# Altium PCB Mach_actor_v1.final.PcbDoc
Units mil, origin at the board's own origin, x right, y up, seen from the top; angles counter-clockwise.
Board outline 5050 x 2900 mil, 2 copper layers (Top Layer, Bottom Layer); 138 components, 95 nets, 421 pads, 81 vias.
Unrouted connection lines stored in the file: 16.
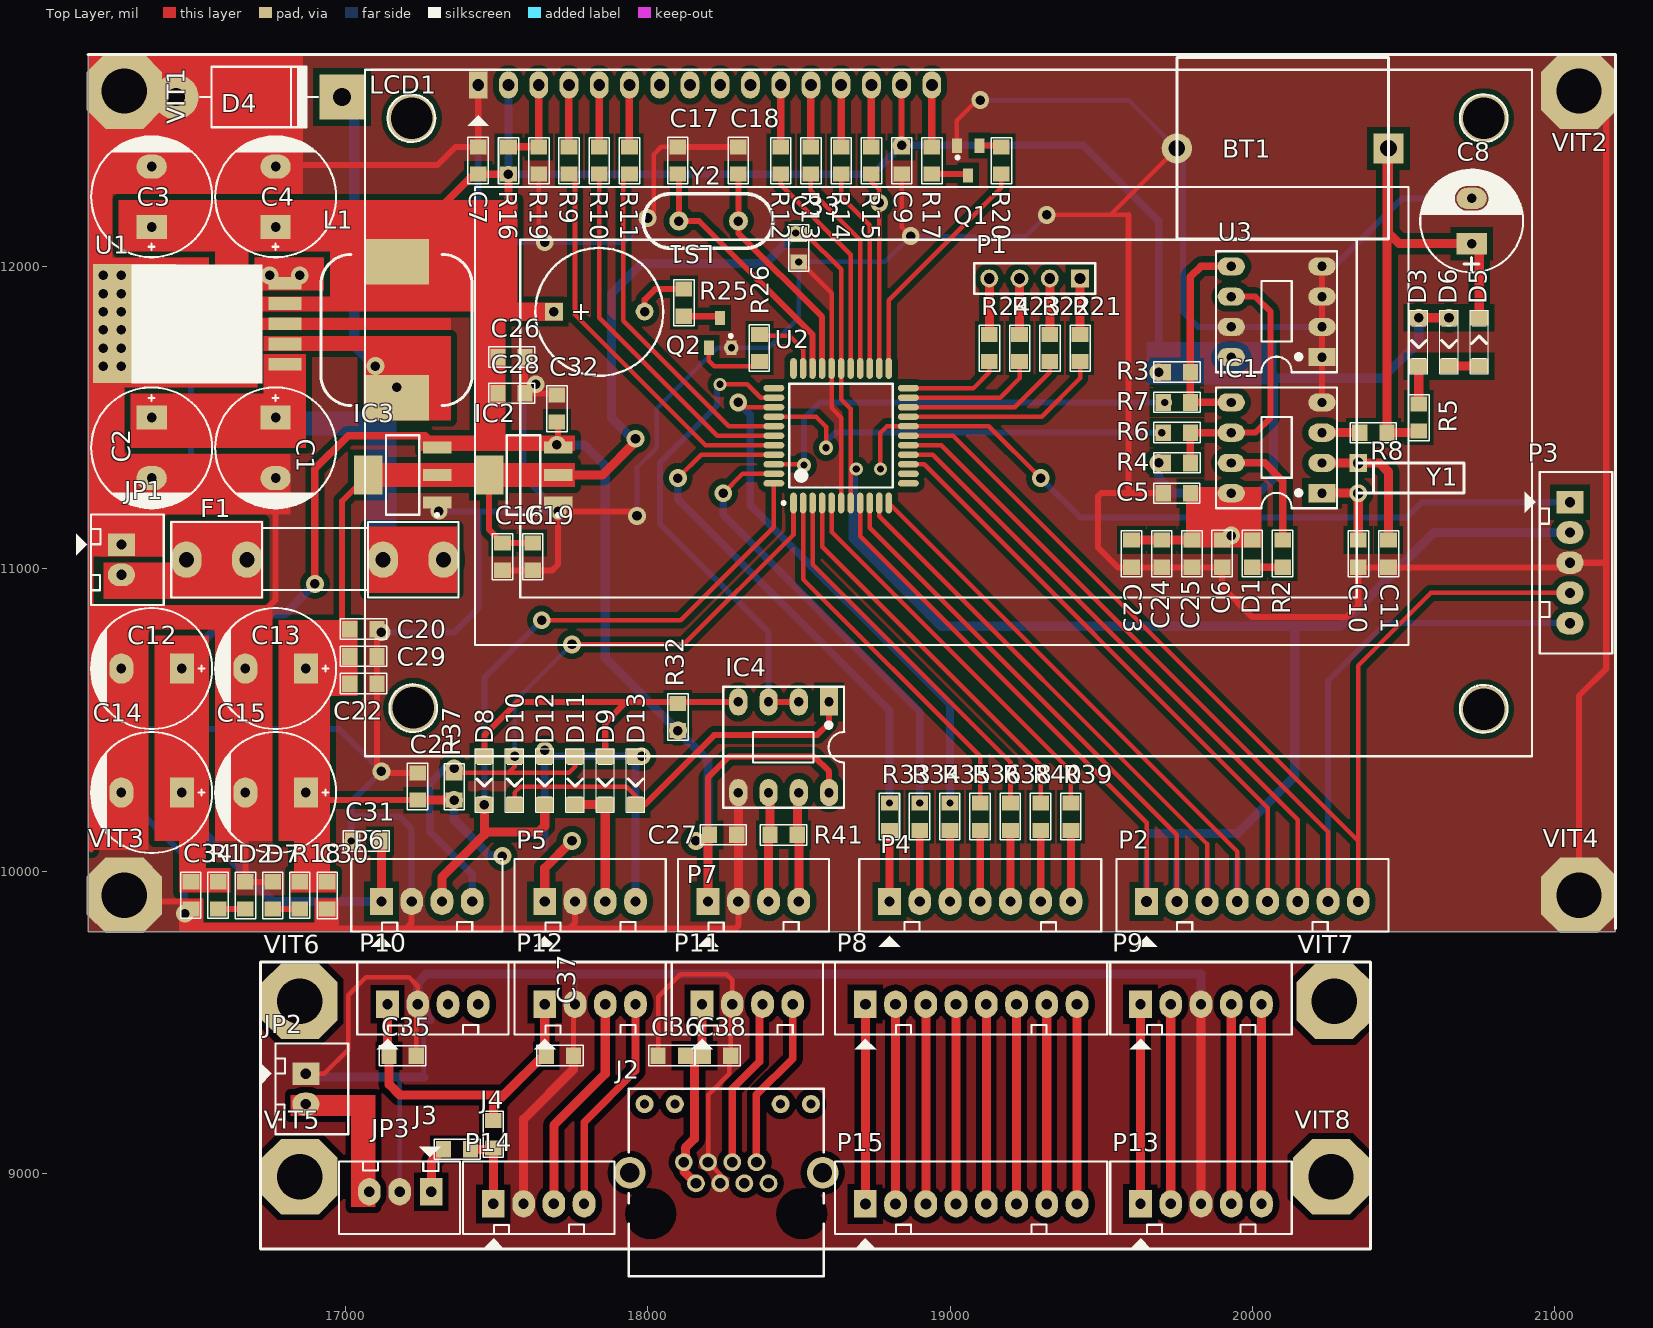
[diagram p0: Top Layer view]
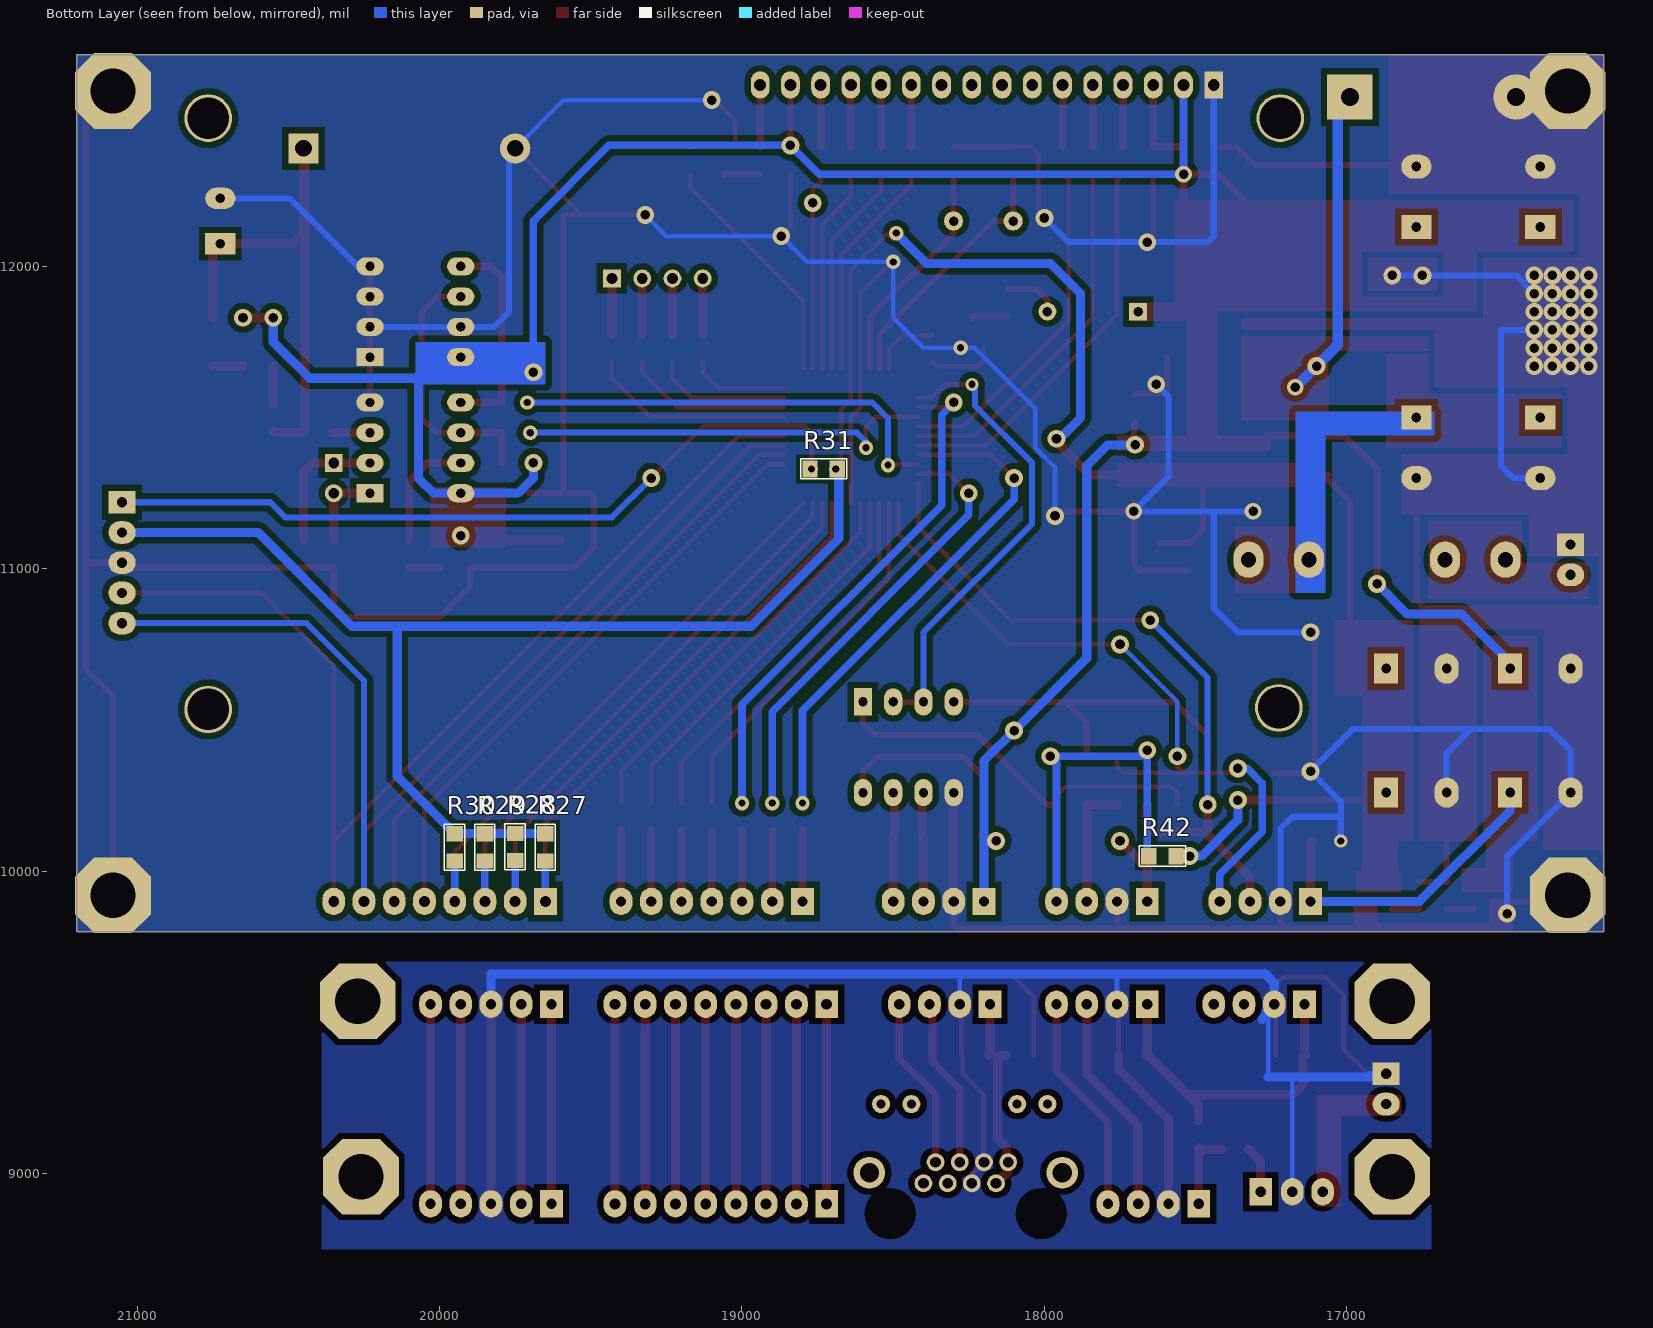
[diagram p1: Bottom Layer view, seen from below]

## Layer stack, top to bottom
Top Layer: signal copper 1.4
Dielectric: dielectric 12.6, FR-4, Dk 4.8
Bottom Layer: signal copper 1.4

## Board outline
16150,12700 21200,12700 21200,9800 16150,9800

## Design rules (kind name [scope] priority, off if disabled: settings)
Clearance [All] p1: gap=20
PlaneConnect [All] p1: planeconnectstyle=Direct reliefexpansion=20 reliefentries=4 reliefconductorwidth=10 reliefairgap=10
PolygonConnect [All] p1: connectstyle=Direct reliefconductorwidth=10 reliefentries=4 polygonreliefangle="90 Angle"
RoutingVias [All] p1: holewidth=28 width=50 viastyle="Through Hole" minholewidth=28 minwidth=50 maxholewidth=28 maxwidth=50
SilkscreenOverComponentPads [All] p1: minsilkscreentomaskgap=10
SolderMaskExpansion [All] p1: expansion=4
Width [All] p1: maxlimit=100 minlimit=15 preferedwidth=20
26 further rules are at their usual default settings.

## Classes and differential pairs
component class Mach_actor_v1: BT1 C1 C2 C3 C4 C5 C6 C7 C8 C9 C10 C11 C12 C13 C14 C15 C16 C17 C18 C19 C20 C21 C22 C23 C24 C25 C26 C27 C28 C29 C30 C31 C32 C33 C34 D1 D2 D3 D4 D5 D6 D7 D8 D9 D10 D11 D12 D13 F1 IC1 IC2 IC3 IC4 JP1 L1 LCD1 LS1 P1 P2 P3 P4 P5 P6 P7 Q1 Q2 R1 R2 R3 R4 R5 R6 R7 R8 R9 R10 R11 R12 R13 R14 R15 R16 R17 R18 R19 R20 R21 R22 R23 R24 R25 R26 R27 R28 R29 R30 R31 R32 R33 R34 R35 R36 R37 R38 R39 R40 R41 R42 U1 U2 U3 VIT1 VIT2 VIT3 VIT4 Y1 Y2
component class Sheet1: C35 C36 C37 C38 J2 J3 J4 JP2 JP3 P8 P9 P10 P11 P12 P13 P14 VIT5 VIT6 VIT7 VIT8

## Components (designator, comment, footprint, x,y, rotation, side; value= is the part's Value field where it differs from the comment)
BT1 "PIN 3V" PIN_NIMH 20350,12390 r180 top
C1 "1000uF/16V" CP2/4 16770,11500 r270 top
C2 "1000uF/16V" CP2/4 16360,11500 r270 top
C3 "1000uF/16V" CP2/4 16360,12130 r90 top
C4 "1000uF/16V" CP2/4 16770,12130 r90 top
C5 "104" SM-0805 19750,11250 r0 top
C6 "104" SM-0805 19900,11050 r270 top
C7 "104" SM-0805 17440,12350 r270 top
C8 "1000uF/16V" CP1.5/3.4 20725,12075 r90 top
C9 "104" SM-0805 18840,12350 r90 top
C10 "104" SM-0805 20350,11050 r90 top
C11 "104" SM-0805 20450,11050 r90 top
C12 "1000uF/16V" CP2/4 16460,10670 r180 top
C13 "1000uF/16V" CP2/4 16870,10670 r180 top
C14 "1000uF/16V" CP2/4 16460,10260 r180 top
C15 "1000uF/16V" CP2/4 16870,10260 r180 top
C16 "104" SM-0805 17520,11040 r90 top
C17 "104" SM-0805 18100,12350 r270 top
C18 "104" SM-0805 18300,12350 r270 top
C19 "104" SM-0805 17620,11040 r90 top
C20 "104" SM-0805 17060,10800 r180 top
C21 "104" SM-0805 17240,10280 r270 top
C22 "104" SM-0805 17060,10620 r180 top
C23 "104" SM-0805 19600,11050 r90 top
C24 "104" SM-0805 19700,11050 r90 top
C25 "104" SM-0805 19800,11050 r90 top
C26 "104" SM-0805 17550,11700 r180 top
C27 "104" SM-0805 18250,10120 r180 top
C28 "104" SM-0805 17550,11580 r180 top
C29 "104" SM-0805 17060,10710 r180 top
C30 "104" SM-0805 16940,9920 r90 top
C31 "104" SM-0805 17070,10100 r0 top
C32 "104" SM-0805 17700,11530 r90 top
C33 "104" SM-0805 18500,12060 r270 top
C34 "104" SM-0805 16490,9920 r270 top
C35 "104" SM-0805 17190,9390 r0 top
C36 "104" SM-0805 18080,9390 r180 top
C37 "104" SM-0805 17710,9390 r180 top
C38 "104" SM-0805 18230,9390 r180 top
D1 "LED5" SM-0805 20000,11050 r270 top
D2 "LED5" SM-0805 16670,9920 r90 top
D3 "1N4148" "1n4148 smd" 20550,11750 r270 top
D4 "1N5822" D5A 16990,12560 r180 top
D5 "1N4148" "1n4148 smd" 20750,11750 r90 top
D6 "1N4148" "1n4148 smd" 20650,11750 r270 top
D7 "LED5" SM-0805 16760,9920 r90 top
D8 "1N4148" "1n4148 smd" 17460,10300 r270 top
D9 "1N4148" "1n4148 smd" 17860,10300 r270 top
D10 "1N4148" "1n4148 smd" 17560,10300 r270 top
D11 "1N4148" "1n4148 smd" 17760,10300 r270 top
D12 "1N4148" "1n4148 smd" 17660,10300 r270 top
D13 "1N4148" "1n4148 smd" 17960,10300 r270 top
F1 "F1A" Fuse 16900,11030 r180 top
IC1 "DS1307" DIP8/W0.3 20230,11250 r90 top
IC2 "LM1117" SOT223-4N 17590,11310 r180 top
IC3 "LM1117" SOT223-4N 17190,11310 r180 top
IC4 "MAX485" DIP8/W0.3 18600,10560 r180 top
J2 "RJ45" RJ45 17940,9280 r0 top
J3 "Jumper 2" SM-0805 17370,9080 r180 top
J4 "Jumper 2" SM-0805 17490,9130 r270 top
JP1 "Connector 2" CON2 16260,11080 r270 top
JP2 "Connector 2" CON2 16870,9330 r270 top
JP3 "Connector 3" CON3 17280,8940 r180 top
L1 "300mH" Inductorsmd 17420,11540 r90 top
LCD1 "LCD 20x4A" LCD20X4A 17440,12600 r0 top
LS1 "Speaker" SPEAKER 17690,11850 r0 top
P1 "Header 4" HDR1X4 19430,11960 r180 top
P2 "Header 8" con8 19650,9900 r0 top
P3 "Header 5" CON5 21050,11220 r270 top
P4 "Header 7" CON7 18800,9900 r0 top
P5 "Header 4" CON4 17660,9900 r0 top
P6 "Header 4" CON4 17120,9900 r0 top
P7 "Header 4" CON4 18200,9900 r0 top
P8 "Header 8" con8 18720,9560 r0 top
P9 "Header 5" CON5 19630,9560 r0 top
P10 "Header 4" CON4 17140,9560 r0 top
P11 "Header 4" CON4 18180,9560 r0 top
P12 "Header 4" CON4 17660,9560 r0 top
P13 "Header 5" CON5 19630,8900 r0 top
P14 "Header 4" CON4 17490,8900 r0 top
P15 "Header 8" con8 18720,8900 r0 top
Q1 "C1815" SOT23B 19060,12350 r180 top
Q2 "C1815" SOT23B 18240,11780 r0 top
R1 "2k2" SM-0805 16580,9920 r270 top
R2 "4K7" SM-0805 20100,11050 r270 top
R3 "4K7" SM-0805 19750,11650 r180 top
R4 "4K7" SM-0805 19750,11350 r180 top
R5 "10" SM-0805 20550,11500 r90 top
R6 "10" SM-0805 19750,11450 r180 top
R7 "10" SM-0805 19750,11550 r180 top
R8 "10" SM-0805 20400,11450 r0 top
R9 "10" SM-0805 17740,12350 r90 top
R10 "10" SM-0805 17840,12350 r90 top
R11 "10" SM-0805 17940,12350 r90 top
R12 "10" SM-0805 18440,12350 r90 top
R13 "10" SM-0805 18540,12350 r90 top
R14 "10" SM-0805 18640,12350 r90 top
R15 "10" SM-0805 18740,12350 r90 top
R16 "10k" SM-0805 17540,12350 r90 top
R17 "10" SM-0805 18940,12350 r90 top
R18 "2k2" SM-0805 16850,9920 r270 top
R19 "1k" SM-0805 17640,12350 r90 top
R20 "2k2" SM-0805 19170,12350 r90 top
R21 "1k" SM-0805 19430,11730 r90 top
R22 "1k" SM-0805 19330,11730 r90 top
R23 "1k" SM-0805 19230,11730 r90 top
R24 "1k" SM-0805 19130,11730 r90 top
R25 "220" SM-0805 18120,11880 r90 top
R26 "2k2" SM-0805 18370,11730 r270 top
R27 "1k" SM-0805 19650,10079 r270 bottom
R28 "1k" SM-0805 19750,10080 r270 bottom
R29 "1k" SM-0805 19850,10079 r270 bottom
R30 "1k" SM-0805 19950,10079 r270 bottom
R31 "10k" SM-0805 18730,11330 r0 bottom
R32 "10k" SM-0805 18100,10510 r90 top
R33 "2k2" SM-0805 18800,10180 r270 top
R34 "2k2" SM-0805 18900,10180 r270 top
R35 "2k2" SM-0805 19000,10180 r270 top
R36 "2k2" SM-0805 19100,10180 r270 top
R37 "10k" SM-0805 17360,10280 r90 top
R38 "2k2" SM-0805 19200,10180 r270 top
R39 "2k2" SM-0805 19400,10180 r270 top
R40 "2k2" SM-0805 19300,10180 r270 top
R41 "2k2" SM-0805 18450,10120 r0 top
R42 "10k" SM-0805 17610,10050 r0 bottom
U1 "LM2596T-5.0" TO263-5 16800,11810 r90 top
U2 "PIC18F46K20T-E/PT" TQFP-PT44_N 18640,11440 r90 top
U3 "24C02" DIP8/W0.3 20230,11700 r90 top
VIT1 "1" VIT 16270,12580 r0 top
VIT2 "1" VIT 21080,12580 r0 top
VIT3 "1" VIT 16270,9920 r0 top
VIT4 "1" VIT 21080,9920 r0 top
VIT5 "1" VIT 16850,8990 r0 top
VIT6 "1" VIT 16850,9570 r0 top
VIT7 "1" VIT 20270,9570 r0 top
VIT8 "1" VIT 20260,8990 r0 top
Y1 "32.768KHz" XTAL32K 20350,11350 r270 top
Y2 "4MHz" XTAL 18200,12150 r180 top

## Footprints (in the part's own frame and the unit in brackets; to place one, negate y for a bottom-side part, rotate by r counter-clockwise, add the part's x,y. Pads: shape width x height; smd on the part's side, far side on the other; paste and mask are expansions set on the pad)
"1n4148 smd" [mil]
  rect 50x60 smd: 1(-80,0) 2(80,0)
  silkscreen extent -105,-30 105,30, body extent -73,-31 73,31
CON2 [mil] "CON2"
  rect 75x90 hole 34: 1(0,0)
  oval 75x90 hole 34: 2(100,0)
  silkscreen extent -100,-150 200,140, body extent -68,-70 168,107, height 236
CON3 [mil] "CON 3"
  rect 75x90 hole 34: 1(-5,0)
  oval 75x90 hole 34: 2(100,0) 3(200,0)
  silkscreen extent -100,-150 300,140, body extent -95,-90 295,136, height 276
CON4 [mil] "CON4"
  rect 75x90 hole 34: 1(0,0)
  oval 75x90 hole 34: 2(100,0) 3(200,0) 4(300,0)
  silkscreen extent -100,-150 400,140, body extent -90,-90 398,136, height 276
CON5 [mil] "CON5"
  rect 75x90 hole 34: 1(0,0)
  oval 75x90 hole 34: 2(100,0) 3(200,0) 4(300,0) 5(400,0)
  silkscreen extent -100,-150 500,140
CON7 [mil] "CON7"
  rect 75x90 hole 34: 1(0,0)
  oval 75x90 hole 34: 2(100,0) 3(200,0) 4(300,0) 5(400,0) 6(500,0) 7(600,0)
  silkscreen extent -100,-150 700,140
con8 [mil] "CON8"
  rect 75x90 hole 36: 1(0,0)
  oval 75x90 hole 36: 2(100,0) 3(200,0) 4(300,0) 5(400,0) 6(500,0) 7(600,0) 8(700,0)
  silkscreen extent -100,-150 800,140
CP1.5/3.4 [mil] "Tu hoa 220->470uF,16V, 470uF/16V,25V"
  rect 70x100 hole 32: 1(0,0)
  oval 70x100 hole 32: 2(150,0)
  silkscreen extent -95,-170 245,170, body extent -85,-157 230,157, height 446
CP2/4 [mil] "Tu hoa 1000uF/16V/25V"
  rect 80x100 hole 32: 1(0,0)
  oval 80x100 hole 32: 2(200,0)
  silkscreen extent -100,-200 300,200
D5A [mil] "Diode 5A, W 200mil, L 550mil"
  round 150 hole 60: 1(550,0)
  rect 150x150 hole 60: 2(0,0)
  silkscreen extent 80,-100 470,100, body extent -52,-106 590,103, height 254
DIP8/W0.3 [mil] "8 PIN, W 300mil, Pin to pin 100mil"
  rect 60x90 hole 31: 1(0,0)
  oval 60x90 hole 31: 2(100,0) 3(200,0) 4(300,0) 5(300,300) 6(200,300) 7(100,300) 8(0,300)
  silkscreen extent -50,-50 350,350, body extent -50,-40 350,336, height 201
Fuse [mil] "De Fuse"
  oval 100x120 hole 50: 1(-425,0) 1(-225,0) 2(225,0) 2(425,0)
  silkscreen extent -475,-125 475,125, body extent -448,-117 459,127, height 378
HDR1X4 [mm] "Connector; Header; 4 Position"
  rect 1.5x1.5 hole 0.9: 1(0,0)
  round 1.5 hole 0.9: 2(2.54,0) 3(5.08,0) 4(7.62,0)
  silkscreen extent -1.27,-1.27 8.89,1.27, body extent -1.27,-1.27 8.89,1.27, height 7
Inductorsmd [mil] "12x12x6mm"
  rect 150x215 smd: 1(25,250) 2(475,250)
  silkscreen extent 0,0 500,500
LCD20X4A [mil] "LCD dipslay 20x4, 16 pin"
  rect 62x90 hole 39: 1(0,0)
  oval 62x90 hole 39: 2(100,0) 3(200,0) 4(300,0) 5(400,0) 6(500,0) 7(600,0) 8(700,0) 9(800,0) 10(900,0) 11(1000,0) 12(1100,0) 13(1200,0) 14(1300,0) 15(1400,0) 16(1500,0)
  round 157.48 hole 137.8: "Hole 0"(-220,-110) "Hole 0"(-215,-2060) "Hole 0"(3325,-2065) "Hole 0"(3325,-110)
  silkscreen extent -375,-2220 3485,50, body extent -392,-2264 3466,98, height 417
PIN_NIMH [mil] "Through hole button, column spacing 200mil"
  rect 100x100 hole 55: 1(-100,0)
  round 100 hole 55: 2(600,0)
  silkscreen extent -100,-300 600,300
RJ45 [mm] "RJ45 Connector, with LEDs"
  round 1.5 hole 0.9: 1(11.684,-7.928) 2(10.668,-6.15) 3(9.652,-7.928) 4(8.636,-6.15) 5(7.62,-7.928) 6(6.604,-6.15) 7(5.588,-7.928) 8(4.572,-6.15)
  round 1.524 hole 0.762: BLA(3.81,-1.27) BLK(1.27,-1.27) YLA(15.24,-1.27) YLK(12.7,-1.27)
  round 2.65 hole 1.6: MH1(0.025,-7.039) MH2(16.231,-7.039)
  round 2.95 hole 3.25 unplated: MH3(1.778,-10.468) MH4(14.478,-10.468)
  silkscreen extent -0.06,-15.75 16.32,0
SM-0805 [mil] "Compoment SMD 80x50mil"
  rect 50x55 smd: 1(-45,0) 2(45,0)
  silkscreen extent -77,-34 76,33, body extent -42,-25 38,25, height 24
SOT23B [mm] "SOT 23B"
  rect 0.85x1.2 smd: 1(0.94,-1.245) 2(0,1.25) 3(-0.95,-1.25)
  silkscreen extent 0.77,-0.38 1.02,-0.13, body extent -1.5,-1.3 1.5,1.2, height 1.06
SOT223-4N [mm] "SOT223, 4-Leads, Body 6.5x3.5mm, Pitch 2.3mm, Lead Span 7mm, IPC Medium Density"
  rect 2.4x1 smd: 1(-2.9,2.3) 2(-2.9,0) 3(-2.9,-2.3)
  rect 2.4x3.3 smd: 4(2.9,0)
  silkscreen extent -3.03,-3.35 1.4,3.47, body extent -3.39,-3.27 3.5,3.23, height 1.72
SPEAKER [mm]
  rect 1.5x1.5 hole 0.8: 1(0,0)
  round 1.5 hole 0.8: 2(7.62,0.013)
  silkscreen extent -1.55,-5.38 9.18,5.36, body extent -2.22,-6 13.24,6, height 4.5
TO263-5 [mm] "LM2576-SMD"
  rect 1.07x2.75 smd: 1(-3.4,-0.025) 2(-1.7,-0.025) 3(0,-0.025) 4(1.7,-0.025) 5(3.4,-0.025)
  rect 10x7 smd: 6(0.025,12.598)
  silkscreen extent -5,1.85 5,12.88, body extent -5,-0.38 5,15.29, height 4.79
TQFP-PT44_N [mm] "Thin QFP, 44-Leads, Body 10x10mm, Pitch 0.8mm, IPC Medium Density"
  oval 1.75x0.55 smd: 1(-5.65,4) 2(-5.65,3.2) 3(-5.65,2.4) 4(-5.65,1.6) 5(-5.65,0.8) 6(-5.65,0) 7(-5.65,-0.8) 8(-5.65,-1.6) 9(-5.65,-2.4) 10(-5.65,-3.2) 11(-5.65,-4) 23(5.65,-4) 24(5.65,-3.2) 25(5.65,-2.4) 26(5.65,-1.6) 27(5.65,-0.8) 28(5.65,0) 29(5.65,0.8) 30(5.65,1.6) 31(5.65,2.4) 32(5.65,3.2) 33(5.65,4)
  oval 0.55x1.75 smd: 12(-4,-5.65) 13(-3.2,-5.65) 14(-2.4,-5.65) 15(-1.6,-5.65) 16(-0.8,-5.65) 17(0,-5.65) 18(0.8,-5.65) 19(1.6,-5.65) 20(2.4,-5.65) 21(3.2,-5.65) 22(4,-5.65) 34(4,5.65) 35(3.2,5.65) 36(2.4,5.65) 37(1.6,5.65) 38(0.8,5.65) 39(0,5.65) 40(-0.8,5.65) 41(-1.6,5.65) 42(-2.4,5.65) 43(-3.2,5.65) 44(-4,5.65)
  silkscreen extent -5.77,-4.35 4.35,4.95, body extent -5,-5 5,5, height 1.2
VIT [mil] "VIT"
  oct 250x250 hole 150: VIT1(0,0)
XTAL [mm]
  round 1.6 hole 0.8: 1(-2.552,0.001) 2(2.448,0.001)
  silkscreen extent -5.44,-2.29 5.44,2.29, body extent -5.55,-2.32 5.62,2.35, height 3.63
XTAL32K [mm] "Connector; Header; 2 Position"
  rect 1.5x1.5 hole 0.9: 1(0,0)
  round 1.5 hole 0.9: 2(2.54,0)
  silkscreen extent 0,0 2.54,8.89

## Part data
BT1: "Battery 3VDC"
C1 C2 C3 C4 C8 C12 C13 C14 C15: library part CP4, "Cap 1000uF/16V - 220uF/50V"
C5 C6 C7 C9 C10 C11 C16 C17 C18 C19 C20 C21 C22 C23 C24 C25 C26 C27 C28 C29 C30 C31 C32 C33 C34 C35 C36 C37 C38: library part CM, "Cap SMD"
D1 D2 D7: library part "LED 5mm", "LED 5mm"
D3 D5 D6 D8 D9 D10 D11 D12 D13: library part D1A, "Diode 1A"
D4: library part D5A, "Diode 5A"
F1: library part Fuse, "Fuse"
IC1: "Real Timer Serial"
IC2 IC3: "3v3"
IC4: "RS232 - RS485 (Same sn75176)"
J2: "RJ45 Connector, with Leds"
J3 J4: library part "JP 2"
JP1 JP2: library part CON2
JP3: library part CON3
L1: library part L1, "Inductor"
LCD1: library part LCD20x4A, "LCD dipslay 20 char, 4 line"
LS1: "Loudspeaker"
P1 P5 P6 P7 P10 P11 P12 P14: "Header, 4-Pin"
P2 P8 P15: "Header, 8-Pin"
P3 P9 P13: "Header, 5-Pin"
P4: "Header, 7-Pin"
Q1 Q2: "NPN 600mW, ECB"
R1 R2 R3 R4 R5 R6 R7 R8 R9 R10 R11 R12 R13 R14 R15 R16 R17 R18 R19 R20 R21 R22 R23 R24 R25 R26 R27 R28 R29 R30 R31 R32 R33 R34 R35 R36 R37 R38 R39 R40 R41 R42: library part R, "Resistor 1/4W"
U1: library part LM2576T-5.0, "SIMPLE SWITCHER; 3A Step-Down Voltage Regulator"
U2: "Flash Microcontroller with 10-Bit A/D and nanoWatt Technology, 32K Flash, 44-Pin TQFP, Extended Temperature Range, Tape and Reel"
U3: "Two-wired Serial EEPROM 2K(256x6)"
VIT1 VIT2 VIT3 VIT4 VIT5 VIT6 VIT7 VIT8: library part VIT, "Oc Vit"
Y1: library part XTAL/32KHz, "Crystal Oscillator"
Y2: library part XTAL, "Crystal Oscillator"

## Via types
v1: diameter 59.06, hole 31.5, Top Layer to Bottom Layer, 63 vias
v2: diameter 47.24, hole 23.62, Top Layer to Bottom Layer, 10 vias
v3: diameter 43.31, hole 23.62, Top Layer to Bottom Layer, 4 vias
v4: diameter 55.12, hole 31.5, Top Layer to Bottom Layer, 4 vias

## Nets (pads, with @x,y where several pads share a name; then routed paths per layer and width w, separated by ;. In a path a pad name is that pad's centre, name@x,y a point inside that pad or via, vN(x,y) a via of type N, cw(c..) or ccw(c..) an arc to the next point about the centre after c; other vN are vias at no path point)
12V: F1.2 JP1.2 JP2.2 JP3.3 | length 464.9
  Top Layer w40: JP2.2 17020,9230 17080,9170 JP3.3
+3.3V: C13.1 C15.1 C16.2 C19.2 C20.2 C21.2 C22.2 C29.2 C30.2 IC2.2 IC2.4 IC3.2 IC3.4 P3.2 P9.2 P13.2 R18.1 R27.1 R28.1 R29.1 R30.1 R31.1 R37.1 R42.1 U2.7 U2.28 | length 10126.5
  Top Layer w15: v2@18500,12090 18515,12105 18525,12105 18640,11990 U2.28 18640,11560 18671.5,11528.5 U2.7
  Top Layer w20: R18.1@16870,9985 R18.1 C30.2 ; IC3.4@17060,11310 IC3.4 ; C21.2 16895,10235 C15.1 C13.1 16920,10670 16990,10740 16990,11224.17 IC3.4 ; C19.2 C16.2 17475.83,11129.17 IC2.4 ; IC2.2 IC2.4 ; IC3.4 IC3.2 IC2.4
  Top Layer w30: C21.2 v1(17360,10235) ; IC2.2 17850,11310 v1@17965,11425 ; P13.2 P9.2
  Bottom Layer w30: v1(17360,10235) 17360,10170 17480,10050 v1(17520,10050) ; v1@17960,11420 17880,11500 17880,11910 17980,12010 18390,12010 v2(18490,12110) ; v3(18690,11330) 18680,11320 18680,11100 18970,10810 20140,10810 ; R27.1 R29.1 R30.1 20140,10314 20140,10810 ; P3.2 20600,11120 20290,10810 20140,10810
  other v1: 17960,11430
+5V: C3.1 C4.1 C5.2 C6.1 C7.2 C9.2 C12.1 C14.1 C23.2 C24.2 C25.2 C26.2 C27.2 C28.2 C31.2 C32.1 C33.1 C34.1 C35.1 C36.1 C37.2 C38.2 D1.1 D3.1 D6.1 IC1.8 IC2.3 IC3.3 IC4.8 J2.7 J2.8 J4.1 L1.2 LCD1.2 LCD1.15 LS1.1 P5.1 P6.1 P7.1 P10.1 P11.1 P12.1 R1.1 R3.2 R4.2 R16.1 R32.1 U1.4 U3.8 | length 17513.2
  Top Layer w20: C3.1 16600,12130 ; C12.1 C14.1 16460,9995 C34.1 R1.1 ; C4.1 16600,12130 ; L1.2@17170,12050 L1.2 ; IC3.3 17460,11400.55 ; 17505,11610 17460,11610 ; C32.1 17704.17,11480.83 IC2.3 17460,11400.55 ; C27.2@18200,10115 18200,10310 18270,10380 18550,10380 18600,10330 IC4.8 ; C9.2 v1(18840,12400) LCD1.15 ; 16600,12130 16600,11920 16643.07,11876.93 U1.4 17106.93,11876.93 17150,11920 17150,11995 L1.2 ; L1.2 17385,12015 17460,11940 17460,11610 ; 17460,11400.55 17460,11610
  Top Layer w25: v1(16900,10950) 16900,11330 17010,11440 17264.72,11440 IC3.3 ; L1.2@17150,11995 17150,12015 L1.2@17170,12035 ; L1.2@17170,12050 17425,12305 C7.2 v4(17540,12305) 17540,11880 17570,11850 LS1.1
  Top Layer w30: C31.2 17120,10095 P6.1 ; C35.1@17135,9390 C35.1@17140,9395 ; P10.1 C35.1@17140,9395 ; J4.1 17490,9225 17525,9260 ; P12.1 C37.2@17660,9395 ; P5.1 17660,10010 v1(17750,10100) ; C37.2 C37.2@17660,9395 ; C36.1 18150,9390 18155,9385 18155,9115 18125,9085 18125,9042.87 J2.8 18120,9007.87 J2.7 ; P11.1 18180,9395 C38.2 ; P7.1 18200,10115 C27.2 ; C23.2 C24.2 C25.2 C6.1 ; C5.2 IC1.8 19930,11125 C6.1 ; D1.1 C6.1 ; v1(20550,11830) v1(20650,11830) ; C35.1@17140,9395 C35.1 17145,9295 17180,9260 17525,9260 ; 17525,9260 C37.2@17660,9395
  Bottom Layer w25: LCD1.2 v4(17540,12305) 18745,12305 v1(18840,12400) 19440,12400 19690,12150 v1(19690,11650)
  Bottom Layer w30: C14.1 16460,10200 16760,9900 P6.1 ; C12.1 16460,10690 16620,10850 16800,10850 v1(16900,10950) ; v1(17700,11410) 17790,11410 17860,11340 17860,10705 v1(18100,10465) 18200,10365 P7.1 ; v1(19690,11350) 19690,11300 19740,11250 IC1.8 20020,11250 20070,11300 20070,11620 ; U3.8 20010,11700 20070,11640 20070,11630 20430,11630 20550,11750 v1(20550,11830)
  other v1: 18160,10100 19930,11110
A: IC4.6 J2.4 P7.3 P11.3 R41.1 | length 927.7
  Top Layer w25: J2.4 18280,9280 18370,9370 18370,9550 P11.3
  Top Layer w30: P7.3 18400,10115 R41.1 18405,10255 IC4.6
B: IC4.7 J2.2 P7.4 P11.4 R41.2 | length 936
  Top Layer w25: J2.2 18360,9260 18480,9380 P11.4
  Top Layer w30: P7.4 18500,10115 R41.2 18495,10255 IC4.7
D4: R12.1 U2.27 | length 738.4
  Top Layer w15: R12.1 18440,12270 18671.5,12038.5 U2.27
D5: R13.1 U2.26 | length 710.1
  Top Layer w15: R13.1 18540,12250 18702.99,12087.01 U2.26
D6: R14.1 U2.25 | length 681.7
  Top Layer w15: R14.1 18640,12230 18734.49,12135.51 U2.25
D7: R15.1 U2.24 | length 653.3
  Top Layer w15: R15.1 18740,12280 18765.98,12254.02 U2.24
  other v1: 18765.98,12210
EN: R11.1 U2.38 | length 1135.2
  Top Layer w15: R11.1 17920,12285 17920,11820 18268.5,11471.5 U2.38
GND: BT1.2 C1.2 C2.2 C3.2 C4.2 C5.1 C6.2 C7.1 C8.2 C9.1 C10.1 C11.1 C12.2 C13.2 C14.2 C15.2 C16.1 C17.1 C18.1 C19.1 C20.1 C21.1 C22.1 C23.1 C24.1 C25.1 C26.1 C27.1 C28.1 C29.1 C30.1 C31.1 C32.2 C33.2 C34.2 C35.2 C36.2 C37.1 C38.1 D2.2 D4.1 D7.2 IC1.4 IC2.1 IC3.1 IC4.5 J2.5 J2.6 JP1.1 JP2.1 JP3.2 LCD1.1 P3.3 P5.2 P6.2 P7.2 P9.3 P10.2 P11.2 P12.2 P13.3 P14.2 Q1.1 Q2.1 R19.1 U1.3 U1.5 U2.6 U2.29 U3.1 U3.2 U3.3 U3.4 U3.7 | length 36090.4
  Top Layer w15: JP2.1@16880,9320 JP2.1 16930,9330 17010,9410 17010,9590 17070,9650 17210,9650 17240,9620 P10.2 17235,9555 C35.2 ; R19.1 17640,12100 v1(17660,12080) ; C37.1 17755,9555 P12.2 ; v1(18000,12160) 18020,12180 18020,12370 18045,12395 C17.1 ; C36.2 18035,9585 18110,9660 18260,9660 18280,9640 P11.2 18275,9555 C38.1 18270,9385 18270,9330 18200,9260 J2.6 18200,9037.23 18240,8997.23 J2.5 ; C33.2@18510,12010 18608.5,11911.5 U2.29 18608.5,11531.5 18640,11500 U2.6 ; C9.1 18840,12130 v1(18870,12100) ; Q1.1 19023,12483 19090,12550 v1(19100,12550) ; v1(19320,12170) 19590,12170 ; 19530,12170 BT1.2
  Top Layer w20: C14.2 C12.2 ; 16270,9920 16340,9920 16360,9900 16465,9900 C34.2 16490,9840 16520,9810 16940,9810 ; v1@16304,11811 16305,11810 U1.3 ; C2.2 C1.2 16770,10897.57 16742.43,10870 16740,10870 16710,10840 ; C3.2 C4.2 ; D4.1 16450,12550 16720,12550 16770,12500 C4.2 ; C13.2 C15.2 D2.2 D7.2 ; C30.1 16940,9810 ; C20.1 C29.1 C22.1 17105,10340 17120,10325 C21.1 ; P6.2 17220,9830 17200,9810 ; LCD1.1 C7.1 17365,12395 17305,12335 16775,12335 C4.2 ; C16.1 C19.1 17685,10995 17704.17,11014.17 v4(17704.17,11190) ; C26.1 C28.1 17695,11580 C32.2 ; IC2.1 v4(17704.17,11190) ; P5.2 17760,9830 17740,9810 ; v1(17965,11175) 17950,11190 v4(17704.17,11190) ; C17.1 C18.1 ; P7.2 18300,9820 18290,9810 17740,9810 ; 19590,12170 19590,11250 ; C5.1 19590,11250 ; IC1.4 U3.1 U3.2 U3.3 U3.4 ; 21080,9920 21080,10580 21170,10670 21170,11020 ; 21080,12580 21170,12490 21170,11020 ; 16940,9810 17200,9810 ; 17200,9810 17740,9810 ; 19590,11250 19500,11250 19490,11240 19490,11070 19555,11005 C23.1 C24.1 C25.1 C6.2 19900,10940 20000,10840 20310,10840 20350,10880 C10.1 C11.1 21035,11005 P3.3 21170,11020
  Top Layer w30: P14.2 17590,9180 17755,9345 C37.1 ; P7.2 IC4.5 ; P13.3 P9.3
  Bottom Layer w15: JP3.2 17180,9310 17195,9325 ; P10.2 17260,9540 17260,9320 ; P12.2 17760,9650 17770,9660 ; v1(17965,11175) 17965,11335 18030,11400 18030,11530 18231,11731 v2(18277,11731) 18401,11731 18500,11830 v2(18500,12015) 18785,12015 v1(18870,12100) 19250,12100 v1(19320,12170) ; P11.2 18280,9650 18290,9660 ; v1(19100,12550) 19590,12550 BT1.2
  Bottom Layer w20: v1@16310,11780 v1(16320,11790) 16490,11790 16490,11340 16450,11300 C2.2 ; v1(16380,11910) 16440,11970 v1(16750,11970) v1(16850,11970) ; v1(16470,9860) 16470,10050 C14.2 16260,10400 16330,10470 16590,10470 ; C15.2 16670,10390 16590,10470 ; v3(17020,10100) 17020,10180 ; v1@17130,10800 v1(17120,10790) 17360,10790 17440,10870 17440,11190 ; P6.2 17220,10140 17180,10180 17020,10180 ; v4(17310,11190) 17440,11190 ; LCD1.1 17440,12100 17460,12080 v1(17660,12080) 17920,12080 v1(18000,12160) ; v1(17630,11610) 17590,11570 17590,11304.17 v4(17704.17,11190) 17440,11190 ; BT1.2 19770,12370 19770,11850 19820,11800 U3.7 U3.2 ; U3.4 20270,12000 20495,12225 C8.2 ; 16590,10470 16980,10470 v1(17120,10330) 17020,10230 17020,10180
  Bottom Layer w30: 16925,9325 16920,9320 17260,9320 ; P10.2 17240,9630 17270,9660 17770,9660 18290,9660 19830,9660 P9.3 ; P10.2@17260,9540 17267.5,9532.5 17267.5,9522.47 17280,9509.97
  other v1: 16200,11670 16260,11670 16320,11670 16380,11670 16200,11730 16260,11730 16320,11730 16380,11730 16200,11790 16260,11790 16380,11790 16200,11850 16260,11850 16320,11850 16380,11850 16200,11910 16260,11910 16320,11910 16200,11970 16260,11970 16320,11970 16380,11970
LED_LCD: R20.1 U2.23 | length 796.9
  Top Layer w15: U2.23 18797.48,11887.48 19170,12260 R20.1
NetBT1_1: BT1.1 C8.1 D5.2 R5.1 R8.2 | length 1874
  Top Layer w30: R5.1 20545,11450 R8.2 20445,12385 BT1.1 20450,12110 20485,12075 C8.1 20750,12050 D5.2
NetC1_1: C1.1 C2.1 F1.1 U1.1 | length 1380
  Top Layer w20: C2.1 C1.1 16801,11531 U1.1
  Bottom Layer w20: C1.1 17050,11500 17125,11425 F1.1@17125,11030
NetC10_2: C10.2 IC1.1 Y1.2 | length 275
  Top Layer w30: IC1.1 Y1.2 C10.2
NetC11_2: C11.2 IC1.2 Y1.1 | length 457.4
  Top Layer w30: IC1.2 Y1.1 20420,11350 20450,11320 C11.2
NetD1_2: D1.2 R2.2 | length 100
  Top Layer w25: D1.2 R2.2
NetD2_1: D2.1 R1.2 | length 90
  Top Layer w20: R1.2 D2.1
NetD3_2: D3.2 R5.2 | length 125
  Top Layer w30: R5.2 D3.2
NetD4_2: D4.2 L1.1 U1.2 | length 1568.1
  Top Layer w20: U1.2 17146.93,11743.07 17170,11720 v4(17170,11600) L1.1
  Bottom Layer w35: D4.2 17030,12520 17030,11740 v4(17170,11600)
  other v1: 17100,11670
NetD5_1: D5.1 D6.2 | length 100
  Top Layer w30: D6.2 D5.1
NetD7_1: D7.1 R18.2 | length 90
  Top Layer w20: D7.1 R18.2
NetIC1_3: IC1.3 R8.1 | length 125
  Top Layer w30: IC1.3 R8.1
NetIC1_7: IC1.7 R2.1 | length 389.9
  Top Layer w25: IC1.7 20040,11350 20100,11290 R2.1
NetJ3_1: J3.1 J4.2 P14.1 | length 262.1
  Top Layer w30: J3.1 17485,9080 J4.2 P14.1
NetLCD1_3: LCD1.3 R16.2 R19.2 | length 305
  Top Layer w25: R16.2 R19.2 LCD1.3
NetLCD1_4: LCD1.4 R9.2 | length 205
  Top Layer w25: R9.2 LCD1.4
NetLCD1_5: LCD1.5 R10.2 | length 205
  Top Layer w25: R10.2 LCD1.5
NetLCD1_6: LCD1.6 R11.2 | length 205
  Top Layer w25: R11.2 LCD1.6
NetLCD1_11: LCD1.11 R12.2 | length 205
  Top Layer w25: R12.2 LCD1.11
NetLCD1_12: LCD1.12 R13.2 | length 205
  Top Layer w25: R13.2 LCD1.12
NetLCD1_13: LCD1.13 R14.2 | length 205
  Top Layer w25: R14.2 LCD1.13
NetLCD1_14: LCD1.14 R15.2 | length 205
  Top Layer w25: R15.2 LCD1.14
NetLCD1_16: LCD1.16 R17.2 | length 205
  Top Layer w25: R17.2 LCD1.16
NetLS1_2: LS1.2 R25.2 | length 184
  Top Layer w20: LS1.2 17990,11890 18025,11925 R25.2
NetP1_1: P1.1 R21.2 | length 185
  Top Layer w30: R21.2 P1.1
NetP1_2: P1.2 R22.2 | length 185
  Top Layer w30: R22.2 P1.2
NetP1_3: P1.3 R23.2 | length 185
  Top Layer w30: R23.2 P1.3
NetP1_4: P1.4 R24.2 | length 185
  Top Layer w30: R24.2 P1.4
NetP2_1: P2.1 R27.2 U2.8 | length 1843.8
  Top Layer w15: U2.8 18702.99,11107.01 19650,10160 P2.1
  Bottom Layer w25: P2.1 R27.2
NetP2_2: P2.2 R28.2 U2.9 | length 1873.2
  Top Layer w15: U2.9 18734.49,11135.51 19750,10120 P2.2
  Bottom Layer w25: P2.2 R28.2
NetP2_3: P2.3 R29.2 U2.10 | length 1900.6
  Top Layer w15: U2.10 18765.98,11174.02 19850,10090 P2.3
  Bottom Layer w25: P2.3 R29.2
NetP2_4: P2.4 R30.2 U2.11 | length 1928.9
  Top Layer w15: U2.11 19950,10065.04 P2.4
  Bottom Layer w25: P2.4 R30.2
NetP2_5: P2.5 U2.14 | length 1967.9
  Top Layer w15: U2.14 18914.49,11345.51 20050,10210 P2.5
NetP2_6: P2.6 U2.15 | length 2057.5
  Top Layer w15: U2.15 18942.99,11377.01 20150,10170 P2.6
NetP4_1: P4.1 R33.2 | length 235
  Top Layer w25: P4.1 R33.2
NetP4_2: P4.2 R34.2 | length 235
  Top Layer w25: P4.2 R34.2
NetP4_3: P4.3 R35.2 | length 235
  Top Layer w25: P4.3 R35.2
NetP4_4: P4.4 R36.2 | length 235
  Top Layer w25: P4.4 R36.2
NetP4_5: P4.5 R38.2 | length 235
  Top Layer w25: P4.5 R38.2
NetP4_6: P4.6 R40.2 | length 235
  Top Layer w25: P4.6 R40.2
NetP4_7: P4.7 R39.2 | length 235
  Top Layer w25: P4.7 R39.2
NetP8_1: P8.1 P15.1 | length 660
  Top Layer w30: P15.1 P8.1
NetP8_2: P8.2 P15.2 | length 660
  Top Layer w30: P15.2 P8.2
NetP8_3: P8.3 P15.3 | length 660
  Top Layer w30: P15.3 P8.3
NetP8_4: P8.4 P15.4 | length 660
  Top Layer w30: P15.4 P8.4
NetP8_5: P8.5 P15.5 | length 660
  Top Layer w30: P15.5 P8.5
NetP8_6: P8.6 P15.6 | length 660
  Top Layer w30: P15.6 P8.6
NetP8_7: P8.7 P15.7 | length 660
  Top Layer w30: P15.7 P8.7
NetP8_8: P8.8 P15.8 | length 660
  Top Layer w30: P15.8 P8.8
NetQ1_2: Q1.2 R17.1 | length 121.7
  Top Layer w20: R17.1 19055.79,12305 Q1.2
NetQ1_3: Q1.3 R20.2 | length 74.3
  Top Layer w20: Q1.3 19165.79,12399.21 R20.2
NetQ2_2: Q2.2 R25.1 | length 122.4
  Top Layer w20: R25.1 18234.21,11835 Q2.2
NetQ2_3: Q2.3 R26.2 | length 227.6
  Top Layer w15: Q2.3@18205,11728.39 Q2.3 18202.6,11687.4 18220,11670 18355,11670 R26.2
NetR21_1: R21.1 U2.19 | length 675.2
  Top Layer w15: U2.19 19302.99,11502.99 19430,11630 R21.1
NetR22_1: R22.1 U2.20 | length 550.4
  Top Layer w15: U2.20 19214.49,11534.49 19330,11650 R22.1
NetR23_1: R23.1 U2.21 | length 449.1
  Top Layer w15: U2.21 19165.98,11565.98 19230,11630 R23.1
NetR24_1: R24.1 U2.22 | length 324.3
  Top Layer w15: U2.22 19077.48,11597.48 19130,11650 R24.1
PGC: P2.7 P3.5 P9.5 P13.5 U2.16 | length 4415.8
  Top Layer w15: U2.16 18971.5,11408.5 20250,10130 P2.7
  Top Layer w30: P13.5 P9.5
  Bottom Layer w20: P2.7 20250,10630 20440,10820 P3.5
PGD: P2.8 P3.4 P9.4 P13.4 U2.17 | length 4282
  Top Layer w15: U2.17 19010,11440 20350,10100 ; P2.8 20350,10100 ; P3.4 20590,10920 20350,10680 20350,10100
  Top Layer w30: P13.4 P9.4
RESET: P3.1 P9.1 P13.1 R31.2 U2.18 | length 3214.5
  Top Layer w15: v3(18770,11330) 18770,11450 18791.5,11471.5 U2.18 19128.5,11471.5 v1(19300,11300)
  Top Layer w30: P13.1 P9.1
  Bottom Layer w20: v1(19300,11300) 19430,11170 20510,11170 20560,11220 P3.1
RL1: R33.1 U2.41 | length 1714.4
  Top Layer w15: v1(18100,11300) 18177.01,11377.01 U2.41
  Bottom Layer w25: v1(18100,11300) 18100,11230 18800,10530 v2(18800,10225)
RL2: R34.1 U2.43 | length 1488.3
  Top Layer w15: v1(18250,11250) 18314.02,11314.02 U2.43
  Bottom Layer w25: v1(18250,11250) 18250,11177.97 18900,10527.97 v2(18900,10225)
RL3: R35.1 U2.36 | length 1738.9
  Top Layer w15: v1(18300,11550) 18315.51,11534.49 U2.36
  Bottom Layer w25: v1(18300,11550) 18340,11510 18340,11210 19000,10550 v2(19000,10225)
RL4: R36.1 U2.2 | length 1235.3
  Top Layer w15: U2.2 18514.02,10965.98 19100,10380 R36.1
RL5: R38.1 U2.3 | length 1263.7
  Top Layer w15: U2.3 18545.51,11014.49 19200,10360 R38.1
RL6: R40.1 U2.4 | length 1292
  Top Layer w15: U2.4 18577.01,11072.99 19300,10350 R40.1
RL7: R39.1 U2.5 | length 1320.4
  Top Layer w15: U2.5 18608.5,11121.5 19400,10330 R39.1
RS: R9.1 U2.40 | length 1309.6
  Top Layer w15: R9.1 17760,12285 17760,11840 18191.5,11408.5 U2.40
RS485: IC4.2 IC4.3 U2.35 | length 1578.3
  Top Layer w15: v3(18240,11610) 18330,11610 18374.02,11565.98 U2.35
  Top Layer w20: IC4.3@18399.69,10560.32 IC4.3 IC4.2 IC4.2@18499.69,10560.32
  Bottom Layer w20: v3(18240,11610) 18230,11600 18230,11540 18040.47,11350.47 18040.47,11149.53 18400,10790 IC4.3
RW: R10.1 U2.39 | length 1214.1
  Top Layer w15: R10.1 17840,11830 18230,11440 U2.39
RX_485: D8.1 D9.1 IC4.4 R32.2 | length 1164.6
  Top Layer w20: D8.1 17460,10450 17570,10560 17930,10560 ; D9.1 17860,10490 17930,10560 ; IC4.4 17930,10560
RX_PIC: D10.1 D11.1 P6.4 P10.4 R37.2 U2.1 | length 2491.7
  Top Layer w15: R37.2 17540,10325 ; v1(17560,10380) 17560,10345 17540,10325 ; v1(17750,10750) 18120,10750 18482.52,11112.52 U2.1 ; D11.1 17760,10345 17740,10325 17540,10325
  Bottom Layer w15: v1(17560,10380) 17560,10560 v1(17750,10750)
  Bottom Layer w25: v1(17360,10340) 17330,10340 17280,10290 17280,10130 17420,9990 P6.4
RX_ZIGBEE: D12.1 D13.1 P5.4 P12.4 P14.4 R42.2 | length 1871
  Top Layer w25: P14.4 17790,9170 17960,9340 P12.4
  Bottom Layer w25: R42.2@17660,10076 v1(17660,10400) 17680,10380 v1(17980,10380) 17960,10360 P5.4
SCL: R6.2 U2.37 | length 1398.5
  Top Layer w15: U2.37 18557.01,11502.99 18590,11470 v2(18590,11400)
  Bottom Layer w20: v2(18590,11400) 18590,11420 18620,11450 v2(19700,11450)
SCL': IC1.6 R4.1 R6.1 U3.6 | length 886.4
  Top Layer w20: IC1.6 20010,11450 20060,11500 20060,11850 20010,11900 U3.6
  Top Layer w25: R4.1 R6.1 IC1.6
SDA: R7.2 U2.42 | length 1473.8
  Top Layer w15: U2.42 18514.49,11345.51 v2@18520,11340
  Bottom Layer w20: v2(18517.24,11342.76) 18517.24,11497.24 18570,11550 v2(19710,11550)
SDA': IC1.5 R3.1 R7.1 U3.5 | length 699.5
  Top Layer w25: IC1.5 R7.1 R3.1 19795,11965 19830,12000 U3.5
SPEAKER: R26.1 U2.32 | length 227.9
  Top Layer w15: R26.1 18375,11770 18470,11770 18514.02,11725.98 U2.32
TX_485: D10.2 D13.2 IC4.1 | length 1312.5
  Top Layer w15: D10.2 17560,10260 17580,10280 17930,10280 17960,10250 D13.2
  Top Layer w20: D13.2 17990,10220 18220,10450 18560,10450 18600,10490 IC4.1
TX_PIC: D8.2 D12.2 P6.3 P10.3 U2.44 | length 2384.9
  Top Layer w15: v1(17650,10830) 18110,10830 18417.56,11137.56 U2.44
  Top Layer w30: P6.3 17320,9980 17460,10120 v1(17460,10220) ; 17460,10130 17640,10130 17660,10150 D12.2
  Bottom Layer w20: v1(17460,10220) 17460,10640 v1(17650,10830)
TX_ZIGBEE: D9.2 D11.2 P5.3 P12.3 P14.3 | length 1150.4
  Top Layer w30: P14.3 17690,9160 17860,9330 P12.3 ; D11.2 D9.2 P5.3
V_Z: J3.2 JP3.1 | length 156.6
  Top Layer w30: JP3.1 17285,9040 J3.2
X1: C17.2 U2.31 Y2.2 | length 866
  Top Layer w20: C17.2 18103.61,12301.39 Y2.2 18170.03,12149.97 18545.51,11774.49 U2.31
X2: C18.2 U2.30 Y2.1 | length 757.3
  Top Layer w20: C18.2 18300.46,12304.54 Y2.1 18300.46,12109.54 18577.01,11832.99 U2.30
pads on no net: "LCD1.Hole 0" J2.1 J2.3 J2.BLA J2.BLK J2.MH1 J2.MH2 J2.MH3 J2.MH4 J2.YLA J2.YLK LCD1.7 LCD1.8 LCD1.9 LCD1.10 U1.6 U2.12 U2.13 U2.33 U2.34 VIT1.VIT1 VIT2.VIT1 VIT3.VIT1 VIT4.VIT1 VIT5.VIT1 VIT6.VIT1 VIT7.VIT1 VIT8.VIT1
copper on no net: | length 1010
  Top Layer w15: 16160,10070 16160,11080

## Polygon pours and split planes (outlines as drawn)
GND on Top Layer "Bottom Layer-No Net" (solid, pour order 7): 16150,9800 21200,9800 21200,12700 16150,12700
GND on Top Layer "Bottom Layer-No Net" (solid, pour order 4): 16720,9700 20390,9700 20390,8750 16720,8750
GND on Bottom Layer "Bottom Layer-No Net" (solid, pour order 9): 21200,12700 21200,9800 16150,9800 16150,12700
GND on Bottom Layer "Bottom Layer-No Net" (solid, pour order 6): 16720,8750 16720,9700 20390,9700 20390,8750

## Other copper
Top Layer:
  rectangle net +3.3V: 17120,11270 17760,11350
  rectangle net +5V: 17250,11390 17760,11440
  rectangle net +5V: 17340,11970 17430,12040
  rectangle net +5V: 17430,11400 17530,12040
  rectangle net +5V: 19780,11070 20030,11270
  rectangle net +3.3V: 16830,10000 16950,10110
  rectangle net NetD4_2: 17060,11490 17350,11730
  rectangle net +5V: 16250,12050 17570,12220
  rectangle net +5V: 16950,11850 17570,12050
  rectangle net +5V: 16570,11850 16950,11900
  rectangle net +5V: 16570,11850 16680,12100
  rectangle net GND: 16700,11920 16930,12030
  rectangle net GND: 16150,11600 16550,12030
  rectangle net GND: 16490,11790 17350,11830
  rectangle net NetD4_2: 16730,11720 17350,11770
  rectangle net NetC1_1: 16730,11400 16870,11710
  rectangle net NetC1_1: 16290,11400 16870,11580
  rectangle net GND: 16550,11600 16710,11790
  rectangle net GND: 16150,12030 16230,12700
  rectangle net GND: 16230,12240 16860,12700
  rectangle net 12V: 16200,10900 16730,11020
  rectangle net 12V: 16420,11000 16730,11160
  rectangle net NetC1_1: 17070,10920 17370,11140
  rectangle net GND: 16160,11040 16400,11380
  rectangle net GND: 16400,11180 16820,11380
  rectangle net +5V: 16370,10100 16550,10780
  rectangle net +3.3V: 16780,10100 16950,10780
  rectangle net GND: 16160,10070 16350,10880
  rectangle net GND: 16350,10800 16760,10880
  rectangle net GND: 16570,10100 16760,10800
  rectangle net +5V: 16450,9930 16540,10100
  rectangle net +5V: 16540,9930 16620,10010
  rectangle net GND: 16450,9800 16530,9910
  rectangle net GND: 16530,9800 16980,9830
  rectangle net GND: 16900,9800 16980,9910
  rectangle net +3.3V: 16820,9930 16970,10000
  rectangle net +5V: 17520,11820 17720,11880
  rectangle net GND: 16150,11040 16270,11620
  rectangle net +3.3V: 16780,10580 17040,10830
  rectangle net 12V: 17020,8890 17100,9080
  rectangle net 12V: 16820,9190 17100,9260
  rectangle net 12V: 17020,9070 17100,9200
Bottom Layer:
  rectangle net NetC1_1: 17070,10920 17170,11490
  rectangle net NetC1_1: 16710,11440 17170,11520
  rectangle net +5V: 19650,11610 20080,11750

## Silkscreen, mask and mechanical layers (free items; w line width, h text height)
Top Overlay:
  lines w10: 16150,12700 21200,12700 21200,9810 ; 16720,8750 16720,9700 20390,9700 20390,8750 16720,8750

## Text inside footprints (layer, text, board x,y; h text height)
LS1: Top Overlay "+" at 17745.5,11822 h60